# EAGLE board Design (EAGLE 9.3.1)
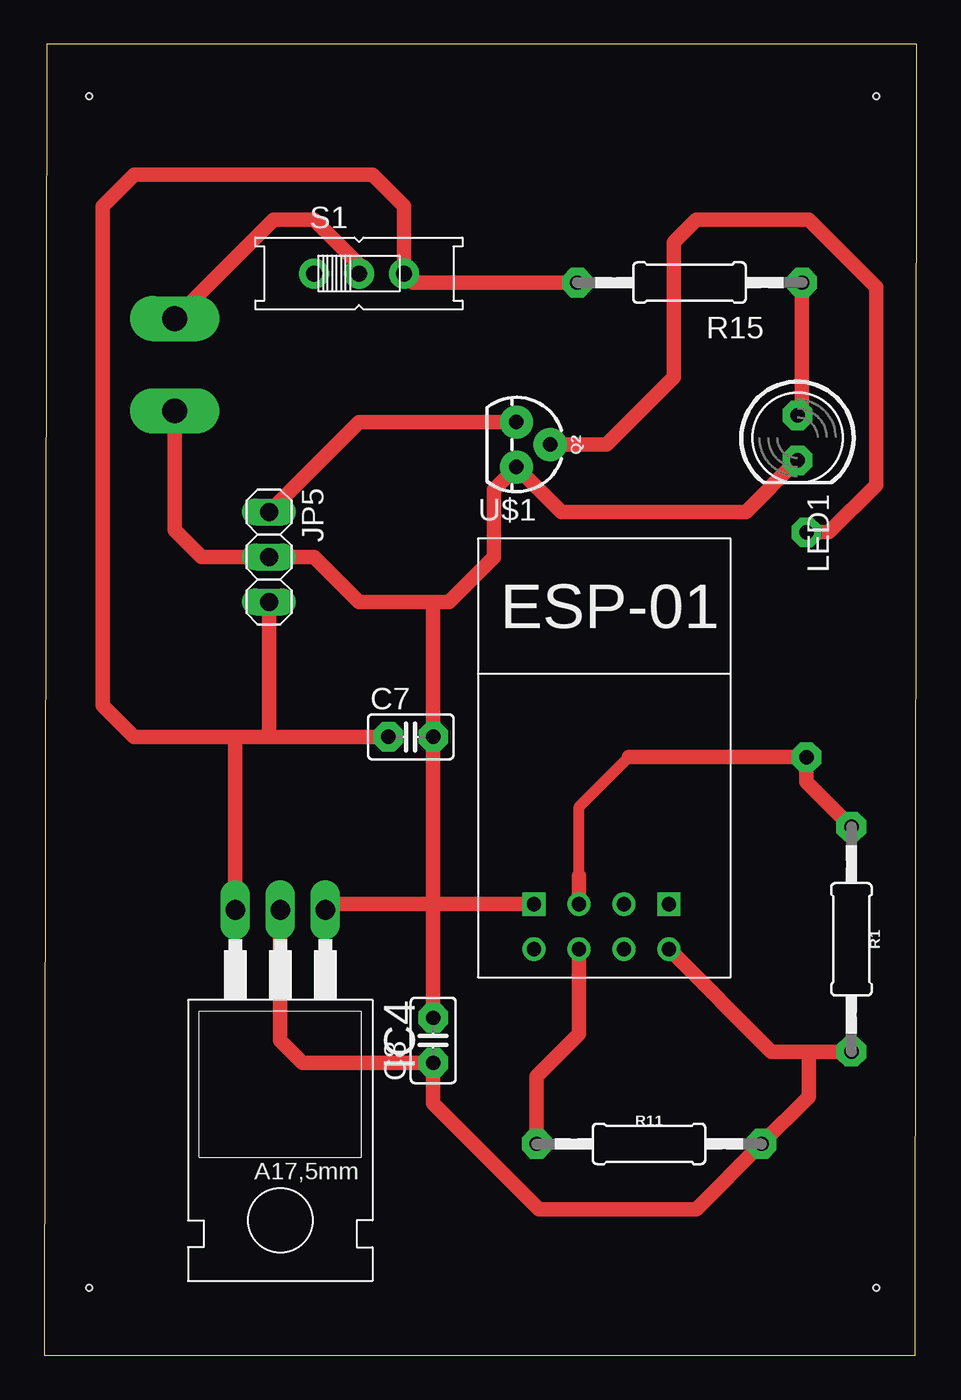
[diagram p0: board, top side]
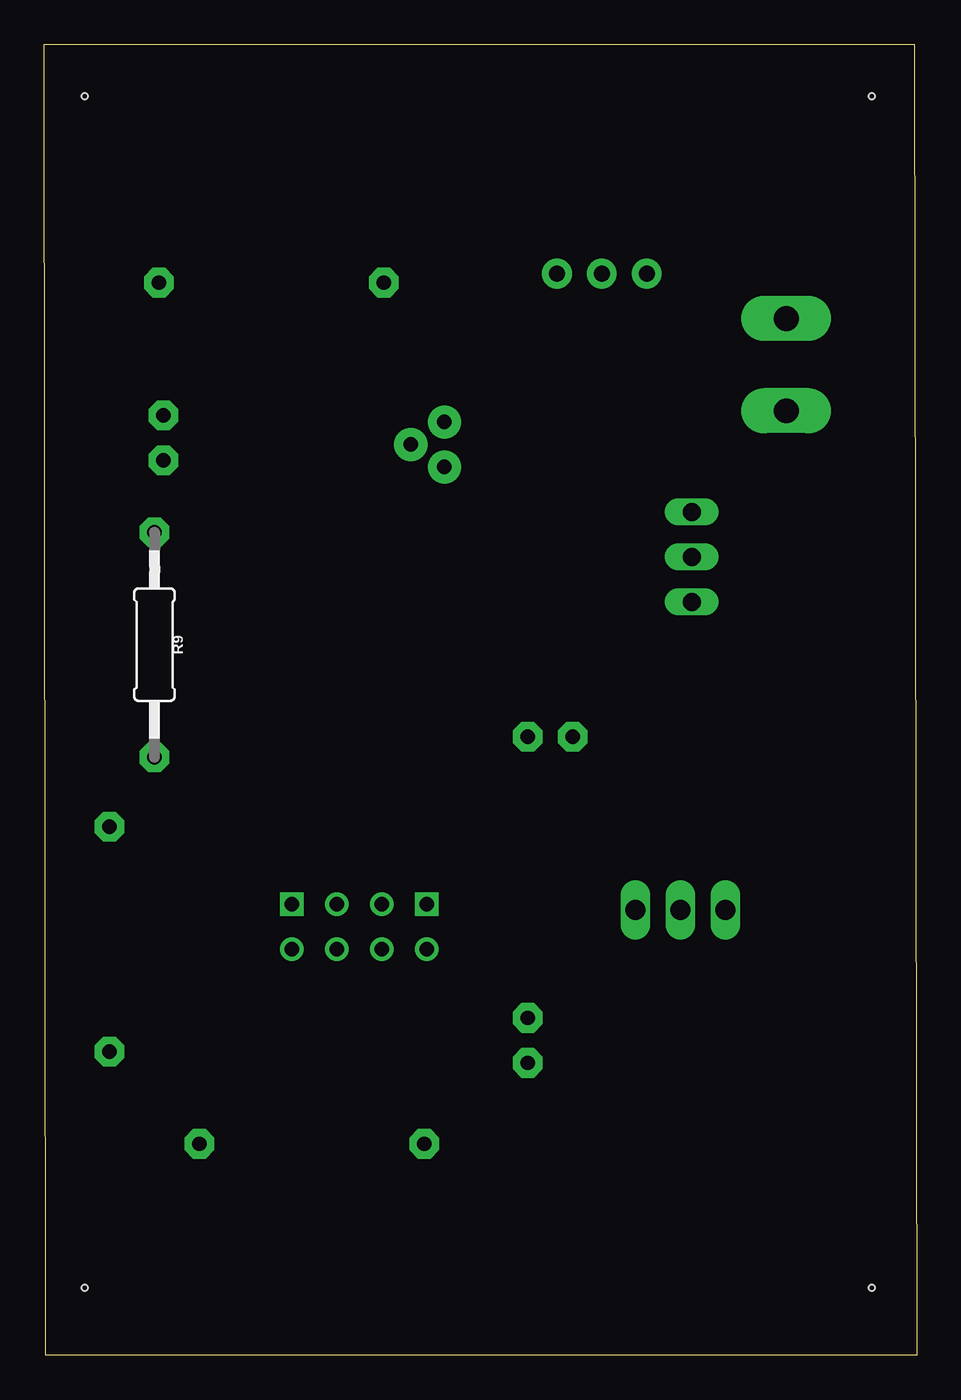
[diagram p1: board, bottom side, seen from below]

Size 49.28 x 74.04 mm. Coordinates in mm from the lower left corner, seen from the top.
Outline: 0,0 49.2,0 49.28,74.04 0.13,74.03 0,0
Copper layers (1*16): Top 0.035mm / dielectric 1.5mm / Bottom 0.035mm
Design rules "default": minimum track width 6mil, minimum drill 0.35mm, track to track 6mil, track to pad 6mil, pad to pad 6mil, via to via 6mil, smd to smd 6mil, copper to edge 40mil, drill to drill 6mil, minimum pad ring 10mil, minimum via ring 8mil, stop-mask expansion 4mil, vias tented up to drill 0mil, thermal gap 10mil
Holes 0.35 mm at 2.54,71.12 46.99,71.12 2.54,3.81 46.99,3.81

## Footprints (pad centres in the part's own frame; a part is rotated, then mirrored left to right if it is on the bottom)
C025-025X050 = drill 0.813 pad 1.676 octagon: 1 -1.27,0; 2 1.27,0
TO220 = drill 1.118 long: 1 -2.54,-6.35; 2 0,-6.35; 3 2.54,-6.35
1X1-BIGPOGO = drill 1.4 pad 2.54 long: P$1 0,0
1X03 = drill 1.016 long: 1 -2.54,0; 2 0,0; 3 2.54,0
LED5MM = drill 0.813 pad 1.676 octagon: A -1.27,0; K 1.27,0
TO-92 = drill 0.813 pad 1.88: 1 -1.27,0; 2 0,1.905; 3 1.27,0
0207/12 = drill 0.813 pad 1.676 octagon: 1 -6.35,0; 2 6.35,0
EG1218 = drill 0.9 pad 1.676: O -2.54,0; P 0,0; S 2.54,0
ESP01 = drill 0.8: CH_PD -1.285,-8.178; GPIO0 1.255,-5.638; GPIO2 -1.285,-5.638; RST 1.255,-8.178; TX -3.825,-8.178; VCC 3.795,-8.178 | drill 0.8 square: GND -3.825,-5.638; RX 3.795,-5.638

## Placement (x,y rotation side)
C7  10uF  [C025-025X050]  20.7,34.92 0 top
C8  10uF  [C025-025X050]  21.97,17.78 90 top
IC4  LM1117T-ADJ  [TO220]  13.34,18.8 180 top
JP1  5V_SUPPLY  [1X1-BIGPOGO]  7.37,58.55 0 top
JP2  GND  [1X1-BIGPOGO]  7.37,53.34 0 top
JP5  RELAY  [1X03]  12.7,45.09 270 top
LED1  GREEN  [LED5MM]  42.55,51.82 270 top
Q2  600mA/40V  [TO-92]  26.67,51.44 270 top
R1  10k  [0207/12]  45.59,23.5 270 top
R9  4.7k  [0207/12]  43.05,40.13 270 bottom
R11  10k  [0207/12]  34.16,11.94 0 top
R15  470  [0207/12]  36.45,60.58 180 top
S1  SWITCH  [EG1218]  17.78,61.09 0 top
U$1  ESP01  [ESP01]  31.5,31.11 0 top

## Library data of the parts
C7 C8 JP1 JP2 LED1 R1 R9 R11 R15 S1 = adafruit
IC4 = lm1117
JP5 = pinhead
Q2 = SparkFun-DiscreteSemi; PROD_ID: TRANS-09536
U$1 = esp8266modules

## Nets
+3V3: C8.1 IC4.2 R1.2 R11.2 U$1.VCC
+5V: C7.1 IC4.3 JP5.3 R15.2 S1.S
GND: C7.2 C8.2 IC4.1 JP2.P$1 JP5.2 LED1.K Q2.3 U$1.GND
GPIO2: R1.1 R9.2 U$1.GPIO2
N$1: JP1.P$1 S1.P
N$3: R11.1 U$1.CH_PD
N$12: JP5.1 Q2.1
N$13: Q2.2 R9.1
N$19: LED1.A R15.1

## Tracks (layer width: path | path; a pad name or v marks a point on that pad's centre or on a via)
+3V3
  Top 0.813: IC4.2 13.34,17.78 14.61,16.51 C8.1 21.97,14.22 27.94,8.26 36.83,8.26 R11.2 43.18,14.61 43.18,17.14 | U$1.VCC 41.08,17.14 43.18,17.14 | 43.18,17.14 R1.2
+5V
  Top 0.813: IC4.3 10.79,34.92 | R15.2 20.83,60.58 S1.S 20.32,64.9 18.54,66.67 5.08,66.67 3.3,64.9 3.3,36.7 5.08,34.92 10.79,34.92 | 10.79,34.92 12.7,34.92 | 12.7,34.92 C7.1 | JP5.3 12.7,34.92
GND
  Top 0.813: 21.97,25.48 C8.2 | 21.97,25.48 U$1.GND | 21.97,25.48 16.21,25.48 IC4.1 | 21.97,25.48 C7.2 21.97,42.55 | 21.97,42.55 22.86,42.55 25.4,45.09 25.4,48.9 Q2.3 29.21,47.62 39.62,47.62 LED1.K | JP2.P$1 7.37,46.61 8.89,45.09 JP5.2 15.24,45.09 17.78,42.55 21.97,42.55
GPIO2
  Top 0.61: 30.21,27.07 30.21,30.97 33.02,33.78
  Top 0.813: R1.1 43.05,32.38 R9.2 33.02,33.78 | U$1.GPIO2 30.21,27.07
N$1
  Top 0.813: JP1.P$1 12.95,64.14 15.24,64.14 17.78,61.59 S1.P
N$3
  Top 0.813: U$1.CH_PD 30.21,18.15 27.81,15.75 R11.1
N$12
  Top 0.813: JP5.1 17.78,52.7 Q2.1
N$13
  Top 0.813: R9.1 44.32,46.48 46.99,49.15 46.99,60.33 43.18,64.14 36.83,64.14 35.56,62.87 35.56,55.24 31.75,51.44 Q2.2
N$19
  Top 0.813: R15.1 42.8,53.34 LED1.A